# Altium PCB LSR41.PcbDoc (part 1 of 2)
Units mm, origin at the board's own origin, x right, y up, seen from the top; angles counter-clockwise.
Board outline 207.01 x 107.19 mm, 2 copper layers (Top Layer, Bottom Layer), stack 1.671 mm thick; 209 components, 141 nets, 682 pads, 307 vias.
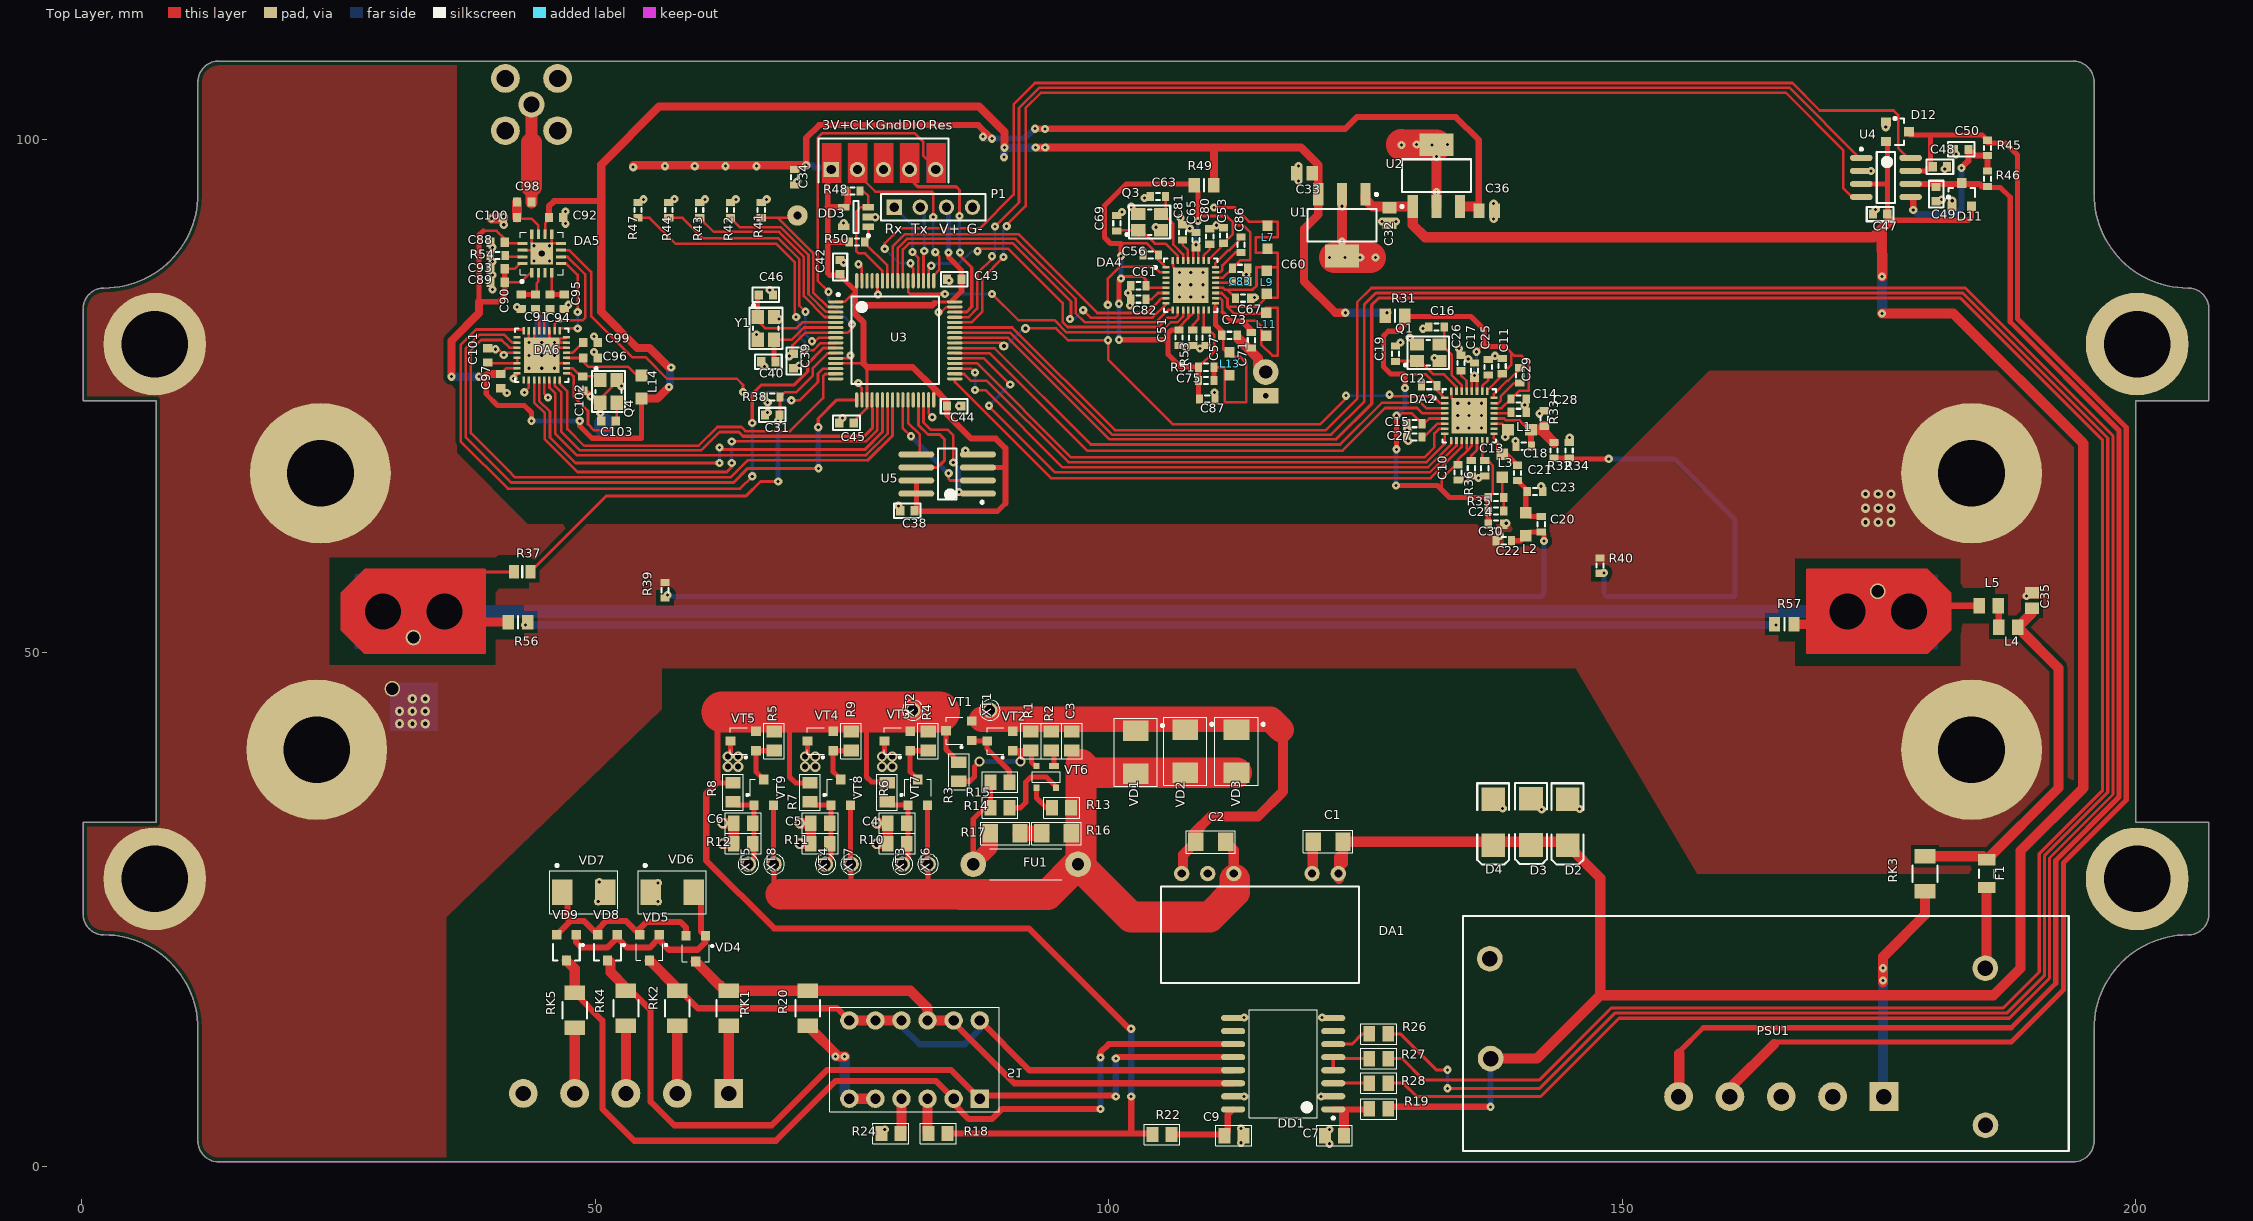
[diagram p0: Top Layer view]
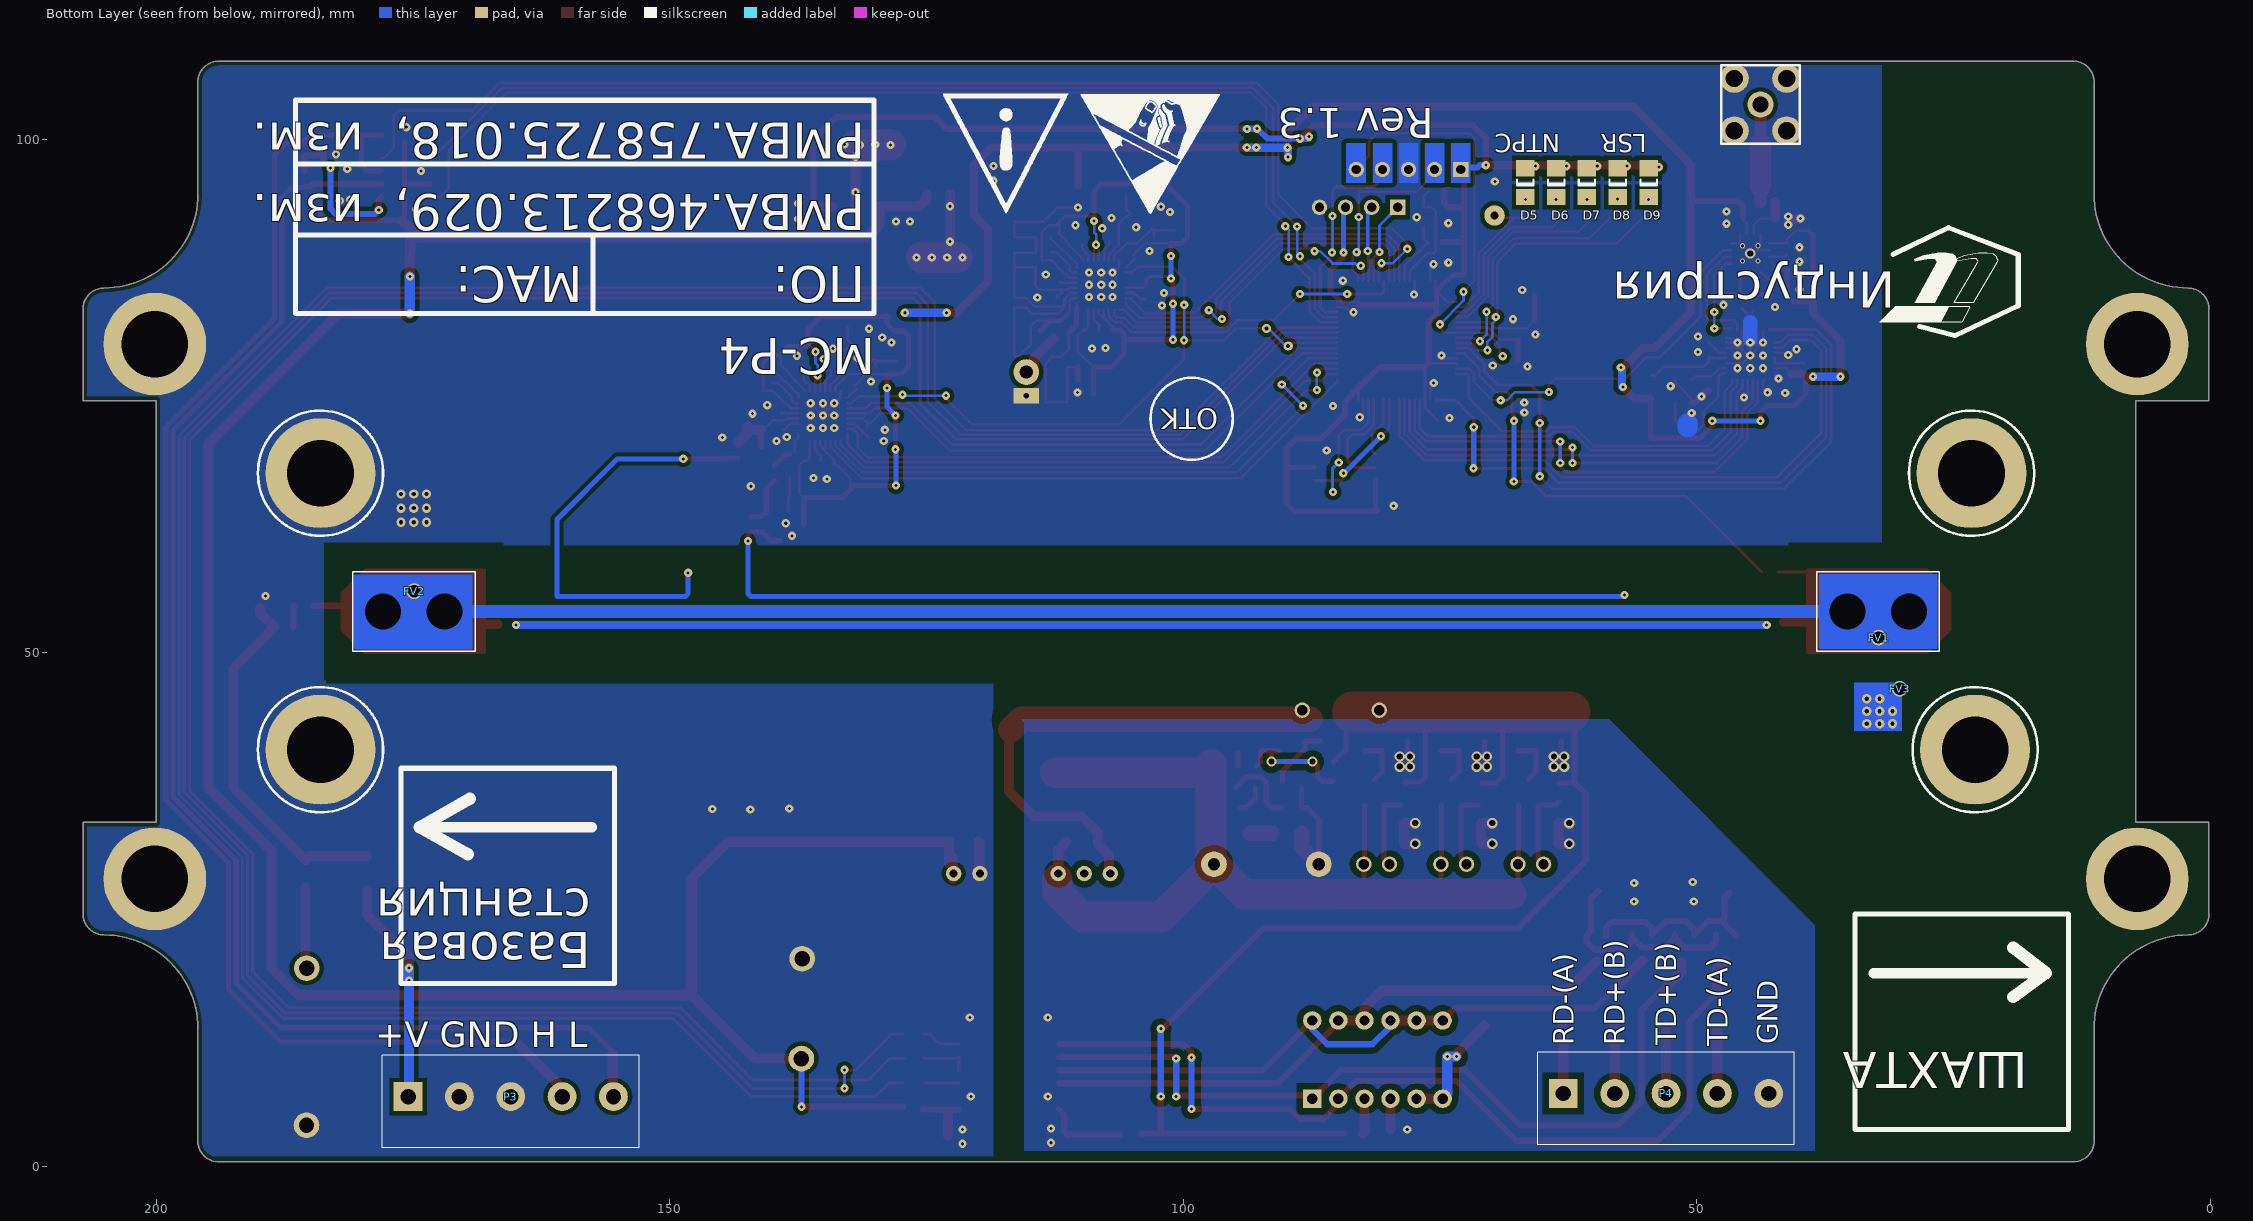
[diagram p1: Bottom Layer view, seen from below]

## Layer stack, top to bottom
Top Solder: solder mask 0.0102, Solder Resist, Dk 3.5
Top Layer: signal copper 0.0356
Dielectric1: core 1.6, FR-4, Dk 4.8
Bottom Layer: signal copper 0.0356
Bottom Solder: solder mask 0.0102, Solder Resist, Dk 3.5

## Board outline
2.168,22.542 cw(c2.169,24.575) 0.136,24.574 0.136,33.515 7.248,33.515 7.248,74.561 0.136,74.561 0.136,83.502 cw(c2.169,83.501) 2.168,85.534 ccw(c2.168,94.678) 11.312,94.678 11.312,105.6 cw(c13.345,105.599) 13.344,107.632 193.938,107.632 cw(c193.938,105.6) 195.97,105.6 195.97,94.678 ccw(c205.114,94.678) 205.114,85.534 cw(c205.114,83.502) 207.146,83.502 207.146,74.561 200.034,74.561 200.034,33.515 207.146,33.515 207.146,24.574 cw(c205.113,24.575) 205.114,22.542 ccw(c205.114,13.398) 195.97,13.398 195.97,2.476 cw(c193.937,2.477) 193.938,0.444 13.344,0.444 cw(c13.345,2.477) 11.312,2.476 11.312,13.398 ccw(c2.168,13.398)

## Design rules (kind name [scope] priority, off if disabled: settings)
Clearance Clearance_Y3_1 [(InNet('GND') AND IsRegion) vs InNet('NetFV1_1')] p1: gap=1
Clearance Clearance_4 [(InNet('+3V3D') AND IsRegion)] p2: gap=0.6
Clearance Clearance_GND_GNDI [InNet('GND') vs InNet('GND_IS1')] p3: gap=3
Clearance Clearance_2 [(InNet('GND_IS1') AND IsRegion)] p4: gap=0.6
Clearance Clearance_1 [(InNet('GND') AND IsRegion)] p5: gap=0.4
Clearance [All] p6: gap=0.2
FabricationTestPointUsage TestPointUsage [All] p1: valid=0 allowmultiple=FALSE
FabricationTestpoint Testpoint [(IsPad And (OnTopLayer Or OnBottomLayer))] p1: side=3 testpointundercomponent=TRUE minsize=1.016 maxsize=2.54 preferedsize=1.524 minholesize=0 maxholesize=1.016 preferedholesize=0.813 testpointgrid=0.025 allowsidetop=TRUE allowsidebottom=TRUE usegrid=TRUE gridtolerance=0
HoleSize [All] p1: absolutevalues=TRUE maxlimit=25.4 minlimit=0.025 maxpercent=80.000 minpercent=20.000
HoleToHoleClearance [All] p1 off: gap=0.254 allowstackedmicrovias=TRUE
MinimumSolderMaskSliver [All] p1 off: minsoldermaskwidth=0.254
PolygonConnect PolygonConnect_2 [IsVia] p1: connectstyle=Direct reliefconductorwidth=0.254 reliefentries=4 polygonreliefangle="90 Angle" airgapwidth=0.254
PolygonConnect PolygonConnect_1 [InNet('GND')and IsVia] p2: connectstyle=Direct reliefconductorwidth=0.254 reliefentries=4 polygonreliefangle="90 Angle" airgapwidth=0.254
PolygonConnect [All] p3: connectstyle=Direct reliefconductorwidth=1 reliefentries=4 polygonreliefangle="90 Angle" airgapwidth=0.254
RoutingVias [All] p1: holewidth=0.4 width=0.9 viastyle="Through Hole" minholewidth=0.4 minwidth=0.9 maxholewidth=0.9 maxwidth=2.5
SilkToSilkClearance [All] p1 off: silktosilkclearance=0.254
SilkToSolderMaskClearance SilkscreenOverComponentPads [IsPad] p1 off: minsilkscreentomaskgap=0.254 clearancetoexposedcopper=TRUE
SolderMaskExpansion [All] p1: expansion=0.102
UnpouredPolygon [All] p1: allowunpoured=FALSE
Width [All] p1: maxlimit=10 minlimit=0.25 preferedwidth=0.3
22 further rules are at their usual default settings.

## Components (designator, comment, footprint, x,y, rotation, side; value= is the part's Value field where it differs from the comment)
C1 "10 мк" "CAP 3216-1206" 121.375,31.625 r0 top
C2 "10 мк" "CAP 3216-1206" 109.952,31.596 r180 top
C3 "1 мкФ, 0805, 10%, X7R, 50В" "CAP 2012-0805N" 96.425,41.425 r90 top
C4 "1000Ф, 0805, 10%, X7R, 50В" "CAP 2012-0805N" 79.425,33.425 r0 top
C5 "1000Ф, 0805, 10%, X7R, 50В" "CAP 2012-0805N" 71.925,33.425 r0 top
C6 "1000Ф, 0805, 10%, X7R, 50В" "CAP 2012-0805N" 64.425,33.425 r0 top
C7 "0,1 мк" "CAP 2012-0805N" 122,3 r0 top
C9 "0,1 мк" "CAP 2012-0805N" 112.2,3 r180 top
C10 "47n" RESC1608L 134.026,67.579 r90 top
C11 "47n" RESC1608L 138.326,77.929 r270 top
C12 "47n" RESC1608L 131.226,76.029 r0 top
C13 "47n" RESC1608L 136.626,67.979 r90 top
C14 "47n" RESC1608L 139.926,74.729 r0 top
C15 "47n" RESC1608L 129.776,72.329 r0 top
C16 "15p" RESC1608L 131.926,81.729 r180 top
C17 "47n" RESC1608L 135.626,77.479 r270 top
C18 "30p" RESC1608L 140.426,70.129 r0 top
C19 "15p" RESC1608L 127.926,79.129 r270 top
C20 "NU" RESC1608L 142.126,62.529 r270 top
C21 "100p" RESC1608L 139.826,67.529 r90 top
C22 "12p" RESC1608L 138.476,60.929 r0 top
C23 "12p" RESC1608L 141.526,65.729 r180 top
C24 "1n" RESC1608L 137.726,63.829 r180 top
C25 "47n" RESC1608L 136.976,77.829 r270 top
C26 "47n" RESC1608L 134.326,78.229 r270 top
C27 "220n" RESC1608L 129.776,71.029 r0 top
C28 "10n" RESC1608L 139.926,73.429 r180 top
C29 "1.5n" RESC1608L 140.026,77.029 r90 top
C30 "47n" RESC1608L 137.726,62.529 r180 top
C31 "100n" CAPC1608L 67.25,73.175 r180 top
C32 "2u2 X7R" CAPC2012L 127.35,92.6 r270 top
C33 "2u2 X7R" CAPC2012L 119.075,96.7 r180 top
C34 "0,1 мкФ, 0603, 10%, X7R, 50В" RESC1608L 69.425,96.325 r90 top
C35 "0.1uF 50V" CAPC2012L 189.925,55.1 r90 top
C36 "2u2 X7R" CAPC2012L 136.825,93.05 r0 top
C38 "100n" CAPC1608L 80.4,63.85 r0 top
C39 "100n" CAPC1608L 69.325,78.425 r270 top
C40 "18p" CAPC1608L 66.873,78.364 r180 top
C42 "100n" CAPC1608L 73.85,87.575 r90 top
C43 "100n" CAPC1608L 84.975,86.4 r180 top
C44 "100n" CAPC1608L 84.952,74.036 r0 top
C45 "100n" CAPC1608L 74.475,72.4 r180 top
C46 "18p" CAPC1608L 66.623,84.864 r0 top
C47 "100n" CAPC1608L 175.127,92.735 r180 top
C48 "15p" CAPC1608L 180.952,97.335 r180 top
C49 "15p" CAPC1608L 180.581,94.683 r90 top
C50 "NU" CAPC1608L 183.027,99.035 r0 top
C51 "47n" RESC1608L 106.85,80.7 r90 top
C53 "47n" RESC1608L 111.2,90.65 r270 top
C56 "47n" RESC1608L 104.1,88.75 r0 top
C57 "47n" RESC1608L 109.5,80.7 r90 top
C60 "47n" RESC1608L 112.8,87.45 r0 top
C61 "47n" RESC1608L 102.9,85.75 r0 top
C63 "15p" RESC1608L 104.8,94.45 r180 top
C65 "47n" RESC1608L 108.5,90.2 r270 top
C67 "7.5p" RESC1608L 113.1,84.55 r180 top
C69 "15p" RESC1608L 100.8,91.85 r270 top
C71 "1.8p" RESC1608L 113.9,80.45 r270 top
C73 "100p" RESC1608L 111.775,80.925 r180 top
C75 "100p" RESC1608L 109.5,76.525 r180 top
C80 "47n" RESC1608L 109.85,90.55 r270 top
C81 "47n" RESC1608L 107.2,90.95 r270 top
C82 "220n" RESC1608L 102.9,84.45 r0 top
C83 "10n" RESC1608L 112.8,86.175 r180 top
C86 "1.5n" RESC1608L 112.9,89.75 r90 top
C87 "47n" RESC1608L 109.6,74.725 r180 top
C88 "NU" capc1608l 40.5,90 r0 top
C89 "1n" capc1608l 40.5,86.1 r180 top
C90 "1p NU" capc1608l 42.8,84.2 r270 top
C91 "82p" capc1608l 44.2,84.2 r90 top
C92 "22p" capc1608l 46.2,92.4 r0 top
C93 "1n" capc1608l 40.5,87.4 r0 top
C94 "82p" capc1608l 45.6,84.2 r90 top
C95 "1p NU" capc1608l 47,84.2 r90 top
C96 "1uF" capc1608l 49.55,78.725 r180 top
C97 "1uF" capc1608l 40.8,76.475 r90 top
C98 "33p" capc1608l 43.1,93.9 r0 top
C99 "100nF" capc1608l 49.55,80.225 r180 top
C100 "1p" capc1608l 41.7,92.4 r0 top
C101 "1uF" capc1608l 39.55,78.975 r270 top
C102 "15p" capc1608l 48.8,76.225 r90 top
C103 "15p" capc1608l 51.3,72.575 r180 top
D2 "1SMB5919" SMB 144.699,33.509 r270 top
D3 "1SMB5919" SMB 141.13,33.542 r270 top
D4 "1SMB5919" SMB 137.449,33.509 r270 top
D5 "LED Yellow" CD3216-1206 66.7,95.8 r270 bottom
D6 "LED Yellow" CD3216-1206 63.7,95.8 r270 bottom
D7 "LED Red" CD3216-1206 60.7,95.8 r270 bottom
D8 "LED Yellow" CD3216-1206 57.7,95.8 r270 bottom
D9 "LED Yellow" CD3216-1206 54.7,95.8 r270 bottom
D11 "BAV99" SOT-23#1 183.081,94.683 r0 top
D12 "BAV99" SOT-23#1 176.875,100.75 r270 top
DA1 "P6LU-0505ELF" P6LU 117.275,32.325 r180 top
DA2 "CC1200" QFN50P500X500-32WAN 135.126,73.079 r0 top
DA4 "CC1200" QFN50P500X500-32WAN 108,85.8 r0 top
DA5 "CC2591" PQFN65P400X400X100_HS-17N 44.8,88.9 r90 top
DA6 "AT86RF233" QFN50P500X500-32WAN 44.8,78.975 r270 top
DD1 "ADM2484E" SOIC127P1030X265-16N 117,10 r180 top
DD3 "24LC64T-I/OT" SOT23-5AN 75.4,92.45 r180 top
F1 "0.2A 1206" RESC3216L 185.5,28.5 r270 top
FU1 "ВП4 0,2А" Fuse10.2-7x2.7 91.925,29.425 r180 top
FV1 "VIA1" VIA3 32.3,51.5 r0 bottom
FV2 "VIA3" VIA3 174.9,56 r0 bottom
FV3 "VIA1" VIA3 30.25,46.509 r0 bottom
L1 "33nH" INDC2012L#1 140.026,71.729 r0 top
L2 "82nH" INDC2012L#1 140.626,62.529 r270 top
L3 "1uH" INDC2012L#1 138.326,68.229 r90 top
L4 "BLM" CAPC2012N 187.6,52.5 r0 top
L5 "BLM" CAPC2012N 185.7,54.6 r0 top
L7 "NU" INDC2012L#2 115.475,90.475 r270 top
L9 "NU" INDC2012L#2 115.4,86.1 r270 top
L11 "NU" INDC2012L#2 115.35,82 r270 top
L13 "NU" INDC2012L#2 111.775,78.15 r270 top
L14 "1 мкГн" INDC2012L#1 54.5,75.9 r90 top
P1 "UART" HDR1X4 79.125,93.4 r0 top
P3 "" "Разъем KLS2-300 5" 165.5,6.8 r180 bottom
P4 "" "Разъем KLS2-300 5" 53,7.1 r180 bottom
PSU1 "Main PSU" PSU_Mod 164,1.5 r0 top
Q1 "Кварц 40000 Гц" NX3225S 131.126,79.229 r90 top
Q3 "40 MHz" NX3225S 104,91.95 r90 top
Q4 "16 MHz" NX3225S 51.3,75.475 r0 top
R1 "510Ом, 1%, 0805, 0,125 Вт" "RES 2012-0805N" 92.425,41.425 r90 top
R2 "100 кОм, 1%, 0805, 0,125 Вт" "RES 2012-0805N" 94.425,41.425 r90 top
R3 "NUОм, 1%, 0805, 0,125 Вт" "RES 2012-0805N" 85.425,38.425 r270 top
R4 "10 кОм, 1%, 0805, 0,125 Вт" "RES 2012-0805N" 82.425,41.425 r90 top
R5 "10 кОм, 1%, 0805, 0,125 Вт" "RES 2012-0805N" 67.425,41.425 r90 top
R6 "680 кОм, 1%, 0805, 0,125 Вт" "RES 2012-0805N" 78.425,36.425 r90 top
R7 "680 кОм, 1%, 0805, 0,125 Вт" "RES 2012-0805N" 70.925,36.425 r90 top
R8 "680 кОм, 1%, 0805, 0,125 Вт" "RES 2012-0805N" 63.425,36.425 r90 top
R9 "10 кОм, 1%, 0805, 0,125 Вт" "RES 2012-0805N" 74.925,41.425 r90 top
R10 "43 кОм, 1%, 0805, 0,125 Вт" "RES 2012-0805N" 79.425,31.425 r0 top
R11 "43 кОм, 1%, 0805, 0,125 Вт" "RES 2012-0805N" 71.925,31.425 r0 top
R12 "43 кОм, 1%, 0805, 0,125 Вт" "RES 2012-0805N" 64.425,31.425 r0 top
R13 "100Ом, 1%, 0805, 0,125 Вт" "RES 2012-0805N" 95.425,34.925 r180 top
R14 "100Ом, 1%, 0805, 0,125 Вт" "RES 2012-0805N" 89.425,34.925 r0 top
R15 "12 кОм, 1%, 0805, 0,125 Вт" "RES 2012-0805N" 89.425,37.425 r0 top
R16 "NU (1)Ом, 1%, 0805, 0,125 Вт" "RES 3216-1206" 94.925,32.425 r0 top
R17 "NU (1)Ом, 1%, 0805, 0,125 Вт" "RES 3216-1206" 89.925,32.425 r0 top
R18 "2 к" "RES 2012-0805N" 83.4,3.2 r180 top
R19 "220" "RES 2012-0805N" 126.3,5.6 r0 top
R20 "120" MF-NSMF050 70.7,15.4 r90 top
R22 "22" "RES 2012-0805N" 105.2,3.1 r180 top
R24 "2 к" "RES 2012-0805N" 78.8,3.2 r0 top
R26 "5,1 к" "RES 2012-0805N" 126.3,12.9 r180 top
R27 "5,1 к" "RES 2012-0805N" 126.3,10.5 r180 top
R28 "5,1 к" "RES 2012-0805N" 126.3,8.1 r180 top
R31 "2" RESC2012N 127.9,82.85 r180 top
R32 "68" RESC1608L 143.376,69.729 r90 top
R33 "68" RESC1608L 142.426,72.829 r270 top
R34 "NU" RESC1608L 144.851,69.729 r270 top
R35 "20" RESC1608L 137.726,65.129 r0 top
R36 "56k" RESC1608L 135.326,67.979 r90 top
R37 "150k" RESC2012L 42.9,57.9 r180 top
R38 "10k" RESC1608L 67.25,74.925 r180 top
R39 "100" RESC1608L 56.8,56.1 r90 top
R40 "100" RESC1608L 147.85,58.5 r90 top
R41 "1k" RESC1608L 66.178,93.121 r270 top
R42 "1k" RESC1608L 63.178,93.121 r270 top
R43 "1k" RESC1608L 60.178,93.121 r270 top
R44 "1k" RESC1608L 57.178,93.121 r270 top
R45 "NU" RESC1608L 185.581,99.183 r270 top
R46 "NU" RESC1608L 185.581,96.183 r90 top
R47 "1k" RESC1608L 54.178,93.121 r270 top
R48 "4,7 кОм, 1%, 0603, 0,06 Вт" RESC1608L 75.05,94.975 r180 top
R49 "2" RESC2012N 109.3,95.55 r0 top
R50 "4,7 кОм, 1%, 0603, 0,06 Вт" RESC1608L 75.5,90.025 r180 top
R51 "10" RESC1608L 109.5,77.825 r0 top
R53 "56k" RESC1608L 108.2,80.7 r90 top
R54 "4.3k" RESC1608L 40.5,88.7 r0 top
R56 "0 NU" RESC2012N 42.5,53 r0 top
R57 "0 NU" RESC2012N 165.8,52.8 r180 top
RK1 "MF-NSMF020" MF-NSMF050 63,15.4 r270 top
RK2 "MF-NSMF020" MF-NSMF050 58,15.4 r270 top
RK3 "MF-NSMF020" MF-NSMF050 179.5,28.5 r270 top
RK4 "MF-NSMF020" MF-NSMF050 53,15.4 r270 top
RK5 "MF-NSMF020" MF-NSMF050 48,15.2 r270 top
S1 "DS1040-06RN" "DIP Switch 6" 81.1,10.4 r180 top
U1 "MCP1703-3302E/DB" SOT-223-DB3_N 122.725,91.65 r270 top
U2 "MCP1703-3302E/DB" SOT-223-DB3_N 131.925,96.475 r90 top
U3 "STM32L476RCT6" LQFP64_STM 79.223,80.439 r0 top
U4 "TJA1040T" SOIC-150-8 175.7,96.3 r0 top
U5 "W25Q32FVSSI" SOIC-150/208-8 84.275,67.425 r180 top
VD1 "1SMB5919" "DO-214AA (1SMB5945)" 102.65,40.325 r270 top
VD2 "1SMB5919" "DO-214AA (1SMB5945)" 107.45,40.425 r270 top
VD3 "1SMB5919" "DO-214AA (1SMB5945)" 112.45,40.425 r270 top
VD4 "BAV99" SOT-23#2 59.8,21.2 r180 top
VD5 "BAV99" SOT-23#2 55.3,21.3 r180 top
VD6 "1SMB5920" "DO-214AA (1SMB5945)" 57.5,26.7 r0 top
VD7 "1SMB5927" "DO-214AA (1SMB5945)" 48.9,26.7 r0 top
VD8 "BAV99" SOT-23#2 51.2,21.3 r180 top
VD9 "BAV99" SOT-23#2 47.2,21.3 r180 top
VT1 "IRLML6402" SOT-23#2 85.425,42.425 r90 top
VT2 "BC857" SOT-23#2 89.425,41.425 r90 top
VT3 "IRLML6402" SOT-23#2 79.425,41.425 r90 top
VT4 "IRLML6402" SOT-23#2 71.925,41.425 r90 top
VT5 "IRLML6402" SOT-23#2 64.425,41.425 r90 top
VT6 "BCM61B" SOT-143B 93.925,37.925 r180 top
VT7 "BC847" SOT-23#2 81.425,36.425 r0 top
VT8 "BC847" SOT-23#2 73.925,36.425 r0 top
VT9 "BC847" SOT-23#2 66.425,36.425 r0 top
XT1 "PLD 1x1" "Тест 1,0/1,5 мм" 88.425,44.425 r270 top
XT2 "PLD 1x1" "Тест 1,0/1,5 мм" 80.925,44.425 r0 top
XT3 "PLD 1x1" "Тест 1,0/1,5 мм" 79.925,29.425 r0 top
XT4 "PLD 1x1" "Тест 1,0/1,5 мм" 72.425,29.425 r0 top
XT5 "PLD 1x1" "Тест 1,0/1,5 мм" 64.925,29.425 r0 top
XT6 "PLD 1x1" "Тест 1,0/1,5 мм" 82.425,29.425 r0 top
XT7 "PLD 1x1" "Тест 1,0/1,5 мм" 74.925,29.425 r0 top
XT8 "PLD 1x1" "Тест 1,0/1,5 мм" 67.425,29.425 r0 top
Y1 "16 MHz" NX3225S-4 66.623,81.614 r0 top

## Footprints (in the part's own frame and the unit in brackets; to place one, negate y for a bottom-side part, rotate by r counter-clockwise, add the part's x,y. Pads: shape width x height; smd on the part's side, far side on the other; paste and mask are expansions set on the pad)
"CAP 2012-0805N" [mm] "Chip Capacitor, Body 2.0x1.3mm, IPC Medium Density"
  rect 1.15x1.5 smd: 1(-0.925,0) 2(0.925,0)
  silkscreen extent -1.75,-1 1.75,1, body extent -1,-0.6 1,0.6, height 0.9
"CAP 3216-1206" [mm] "Chip Cap; Body 3.2 x 1.6 mm (LxW typ)"
  rect 1.5x1.8 smd: 1(-1.45,0) 2(1.45,0)
  silkscreen extent -2.4,-1.1 2.4,1.1, body extent -1.6,-0.8 1.6,0.8, height 1.3
CAPC1608L [mm] "Chip Capacitor, Body 1.6x0.8mm, IPC High Density"
  rect 0.8x0.9 smd: 1(-0.7,0) 2(0.7,0)
  silkscreen extent -1.3,-0.7 1.3,0.7, body extent -0.87,-0.48 0.87,0.48, height 0.85
capc1608l [mm] "Chip Capacitor, Body 1.6x0.8mm, IPC High Density"
  rect 0.8x0.9 smd: 1(-0.7,0) 2(0.7,0)
  body extent -0.87,-0.48 0.87,0.48, height 0.85
CAPC2012L [mm] "Chip Capacitor, Body 2.0x1.3mm, IPC High Density"
  rect 1.1x1.4 smd: 1(-0.75,0) 2(0.75,0)
  body extent -1.1,-0.72 1.1,0.72, height 1.1
CAPC2012N [mm] "Chip Capacitor, Body 2.0x1.3mm, IPC Medium Density"
  rect 1.15x1.5 smd: 1(-0.925,0) 2(0.925,0)
  body extent -1.1,-0.72 1.1,0.72, height 1.1
CD3216-1206 [mm] "Chip Diode; Body 3.2 x 1.6 mm (LxW typ)"
  rect 1.6x1.8 smd: 1(-1.4,0) 2(1.4,0)
  silkscreen extent -0.3,-0.8 0.3,0.8, body extent -1.85,-0.9 1.9,0.9, height 0.5
"DIP Switch 6" [mm]
  rect 1.8x1.8 hole 1: 1(-6.35,3.81)
  round 1.8 hole 1: 2(-3.81,3.81) 3(-1.27,3.81) 4(1.27,3.81) 5(3.81,3.81) 6(6.35,3.81) 7(6.35,-3.81) 8(3.81,-3.81) 9(1.27,-3.81) 10(-1.27,-3.81) 11(-3.81,-3.81) 12(-6.35,-3.81)
  silkscreen extent -8.25,-5.08 8.25,5.08, body extent -8.12,-4.95 8.12,4.95, height 3.7
"DO-214AA (1SMB5945)" [mm] "Стабилитрон 1SMB5945"
  rect 2x2.5 smd: 1(-2.1,0) 2(2.1,0)
  silkscreen extent -3.3,-2.1 3.3,2.73, body extent -2.8,-1.9 2.8,1.9, height 2.4
Fuse10.2-7x2.7 [mm] "Diode, Axial; Body 7 x 2.7 mm (LxDia. max), Lead Dia. 0.53 mm (max)"
  round 2.5 hole 1.2: 1(-5.1,0) 2(5.1,0)
  silkscreen extent -3.5,-1.5 3.5,1.5, body extent -5.4,-1.5 5.4,1.5, height 3.5
HDR1X4 [mm] "Connector; Header; 4 Position"
  rect 1.5x1.5 hole 0.9: 1(0,0)
  round 1.5 hole 0.9: 2(2.54,0) 3(5.08,0) 4(7.62,0)
  silkscreen extent -1.27,-1.27 8.89,1.27
INDC2012L#1 [mm] "Chip Inductor, Body 2.0x1.2mm, IPC High Density"
  rect 1.15x1.15 smd: 1(-1.12,0) 2(1.12,0)
  body extent -1.1,-0.7 1.1,0.7, height 1.1
INDC2012L#2 [mm] "Chip Inductor, Body 2.0x1.2mm, IPC High Density"
  rect 1x1 smd: 1(-1.12,0) 2(1.12,0)
  body extent -1.1,-0.7 1.1,0.7, height 1.1
LQFP64_STM [mm] "Thin QFP, 64-Leads, Body 10x10mm, Pitch 0.5mm, IPC Medium Density"
  oval 1.5x0.3 smd: 1(-5.8,3.75) 2(-5.8,3.25) 3(-5.8,2.75) 4(-5.8,2.25) 5(-5.8,1.75) 6(-5.8,1.25) 7(-5.8,0.75) 8(-5.8,0.25) 9(-5.8,-0.25) 10(-5.8,-0.75) 11(-5.8,-1.25) 12(-5.8,-1.75) 13(-5.8,-2.25) 14(-5.8,-2.75) 15(-5.8,-3.25) 16(-5.8,-3.75) 33(5.8,-3.75) 34(5.8,-3.25) 35(5.8,-2.75) 36(5.8,-2.25) 37(5.8,-1.75) 38(5.8,-1.25) 39(5.8,-0.75) 40(5.8,-0.25) 41(5.8,0.25) 42(5.8,0.75) 43(5.8,1.25) 44(5.8,1.75) 45(5.8,2.25) 46(5.8,2.75) 47(5.8,3.25) 48(5.8,3.75)
  oval 0.3x1.5 smd: 17(-3.75,-5.8) 18(-3.25,-5.8) 19(-2.75,-5.8) 20(-2.25,-5.8) 21(-1.75,-5.8) 22(-1.25,-5.8) 23(-0.75,-5.8) 24(-0.25,-5.8) 25(0.25,-5.8) 26(0.75,-5.8) 27(1.25,-5.8) 28(1.75,-5.8) 29(2.25,-5.8) 30(2.75,-5.8) 31(3.25,-5.8) 32(3.75,-5.8) 49(3.75,5.8) 50(3.25,5.8) 51(2.75,5.8) 52(2.25,5.8) 53(1.75,5.8) 54(1.25,5.8) 55(0.75,5.8) 56(0.25,5.8) 57(-0.25,5.8) 58(-0.75,5.8) 59(-1.25,5.8) 60(-1.75,5.8) 61(-2.25,5.8) 62(-2.75,5.8) 63(-3.25,5.8) 64(-3.75,5.8)
  silkscreen extent -5.67,-4.25 4.25,4.57, body extent -5,-5 5,5, height 1.6
MF-NSMF050 [mm] "Предохранитель самовосст."
  rect 1.4x2 smd: 1(-1.7,0) 2(1.7,0)
  silkscreen extent -0.8,-1.2 0.8,1.2, body extent -1.7,-0.9 1.7,0.9, height 0.85
NX3225S [mm] "Quartz Crystal, SMD, 3.2mm x 2.5mm"
  rect 1.2x1.4 smd: 1(-0.8,1.1) 2(-0.8,-1.1) 3(0.8,-1.1) 4(0.8,1.1)
  silkscreen extent -1.6,-2 1.6,2.34
NX3225S-4 [mm] "Quartz Crystal, SMD, 3.2mm x 2.5mm"
  rect 1.2x1.4 smd: 1(-0.8,1.1) 2(0.8,1.1) 3(0.8,-1.1) 4(-0.8,-1.1)
  silkscreen extent -1.6,-2 1.6,2.34
P6LU [mm] "DC/DC"
  round 1.5 hole 0.8: 1(-5.1,3.81) 2(-2.54,3.81) 5(5.08,3.81) 6(7.62,3.81) 7(10.16,3.81)
  silkscreen extent -7.11,5.08 12.19,14.48, body extent -7.17,3.68 12.33,13.8, height 6
PQFN65P400X400X100_HS-17N [mm] "PQFN, 16-Leads, Body 4,00x4,00mm, Pitch 0,65mm, Thermal Pad 2,16x2,16mm, IPC Medium Density"
  rect 0.95x0.3 smd: 1(-1.875,0.975) 2(-1.875,0.325) 3(-1.875,-0.325) 4(-1.875,-0.975) 9(1.875,-0.975) 10(1.875,-0.325) 11(1.875,0.325) 12(1.875,0.975)
  rect 0.3x0.95 smd: 5(-0.975,-1.875) 6(-0.325,-1.875) 7(0.325,-1.875) 8(0.975,-1.875) 13(0.975,1.875) 14(0.325,1.875) 15(-0.325,1.875) 16(-0.975,1.875)
  rect 2.16x2.16 smd: 17(0,0)
  silkscreen extent -2.85,-2.07 2.07,2.07, body extent -2.07,-2.07 2.07,2.07, height 1
PSU_Mod [mm] "PSU_Module"
  round 2.5 hole 1.5: 1(21.375,17.8) 2(21.39,2.5) 3(-26.8,9) 4(-26.875,18.725)
  silkscreen extent -29.5,0 29.5,22.87
QFN50P500X500-32WAN [mm] "QFN, 32-Leads, Body 5x5mm, Pitch 0.5mm, IPC Medium Density"
  rect 0.7x0.25 smd: 1(-2.4,1.75) 2(-2.4,1.25) 3(-2.4,0.75) 4(-2.4,0.25) 5(-2.4,-0.25) 6(-2.4,-0.75) 7(-2.4,-1.25) 8(-2.4,-1.75) 17(2.4,-1.75) 18(2.4,-1.25) 19(2.4,-0.75) 20(2.4,-0.25) 21(2.4,0.25) 22(2.4,0.75) 23(2.4,1.25) 24(2.4,1.75)
  rect 0.25x0.7 smd: 9(-1.75,-2.4) 10(-1.25,-2.4) 11(-0.75,-2.4) 12(-0.25,-2.4) 13(0.25,-2.4) 14(0.75,-2.4) 15(1.25,-2.4) 16(1.75,-2.4) 25(1.75,2.4) 26(1.25,2.4) 27(0.75,2.4) 28(0.25,2.4) 29(-0.25,2.4) 30(-0.75,2.4) 31(-1.25,2.4) 32(-1.75,2.4)
  rect 3.45x3.45 smd: 33(0,0)
  silkscreen extent -3.57,-2.6 2.6,2.6, body extent -2.58,-2.58 2.58,2.58, height 0.8
"RES 2012-0805N" [mm] "Chip Resistor, Body 2.0x1.3mm, IPC Medium Density"
  rect 1.15x1.5 smd: 1(-0.925,0) 2(0.925,0)
  silkscreen extent -1.75,-1 1.75,1, body extent -1,-0.6 1,0.6, height 0.5
"RES 3216-1206" [mm] "Chip Resistor; Body 3.2 x 1.6 mm (LxW typ)"
  rect 1.5x1.8 smd: 1(-1.45,0) 2(1.45,0)
  silkscreen extent -2.4,-1.1 2.4,1.1, body extent -1.6,-0.8 1.6,0.8, height 0.6
RESC1608L [mm] "Chip Resistor, Body 1.6x0.8mm, IPC High Density"
  rect 0.7x0.9 smd: 1(-0.75,0) 2(0.75,0)
  silkscreen extent -0.2,-0.35 0.2,0.35, body extent -0.85,-0.48 0.85,0.48, height 0.6
RESC2012L [mm] "Chip Resistor, Body 2.0x1.3mm, IPC High Density"
  rect 1x1.3 smd: 1(-0.8,0) 2(0.8,0)
  silkscreen extent 0,-0.55 0,0.55, body extent -1.07,-0.7 1.07,0.7, height 0.65
RESC2012N [mm] "Chip Resistor, Body 2.0x1.3mm, IPC Medium Density"
  rect 1.1x1.4 smd: 1(-0.95,0) 2(0.95,0)
  silkscreen extent 0,-0.6 0,0.6, body extent -1.07,-0.7 1.07,0.7, height 0.65
RESC3216L [mm] "Chip Resistor, Body 3.2x1.6mm, IPC High Density"
  rect 1.1x1.7 smd: 1(-1.35,0) 2(1.35,0)
  silkscreen extent -0.4,-0.75 0.4,0.75, body extent -1.68,-0.87 1.68,0.87, height 0.71
SMB [mm] "DO-214-AA/SMB; 2 C-Bend Leads; Body 5.3 x 3.6 mm, inc. leads (LxW)"
  rect 2.3x2.3 smd: 1(-2.25,0) 2(2.25,0)
  silkscreen extent -3.8,-1.55 4.1,1.55
SOIC127P1030X265-16N [mm] "SOIC, 16-Leads, Body 10,5x7,6mm (max), Pitch 1,27mm, IPC Medium Density"
  oval 2.35x0.6 smd: 1(-4.875,4.445) 2(-4.875,3.175) 3(-4.875,1.905) 4(-4.875,0.635) 5(-4.875,-0.635) 6(-4.875,-1.905) 7(-4.875,-3.175) 8(-4.875,-4.445) 9(4.875,-4.445) 10(4.875,-3.175) 11(4.875,-1.905) 12(4.875,-0.635) 13(4.875,0.635) 14(4.875,1.905) 15(4.875,3.175) 16(4.875,4.445)
  silkscreen extent -5,-5.25 3.3,5.42, body extent -5.15,-5.08 5.15,5.08, height 2.65
SOIC-150-8 [mm] "SOIC, 8-Leads, Body 4.9x3.9mm, Pitch 1.27mm, IPC Medium Density"
  oval 2.2x0.6 smd: 1(-2.4,1.905) 2(-2.4,0.635) 3(-2.4,-0.635) 4(-2.4,-1.905) 5(2.4,-1.905) 6(2.4,-0.635) 7(2.4,0.635) 8(2.4,1.905)
  silkscreen extent -2.52,-2.5 0.9,2.88, body extent -2,-2.5 2,2.5, height 1.75
SOIC-150/208-8 [mm] "SOIC, 8-Leads"
  oval 3.5x0.6 smd: 1(-3,1.905) 2(-3,0.635) 3(-3,-0.635) 4(-3,-1.905) 5(3,-1.905) 6(3,-0.635) 7(3,0.635) 8(3,1.905)
  silkscreen extent -3.52,-2.5 0.9,2.88, body extent -2.73,-2.75 2.73,2.75, height 2.03
SOT23-5AN [mm] "SOT23, 5-Leads, Body 2.9x1.6mm, Pitch 0.95mm, Lead Span 2.8mm, IPC Medium Density"
  rect 1.1x0.65 smd: 1(-1.2,0.95) 2(-1.2,0) 3(-1.2,-0.95) 4(1.2,-0.95) 5(1.2,0.95)
  silkscreen extent -1.33,-1.55 0.25,1.95, body extent -0.9,-1.55 0.9,1.55, height 1.45
SOT-23#1 [mm] "SOT-23; 3 Leads; Body 3.1 x 2.5 mm, inc. leads (LxW max)"
  rect 0.9x0.95 smd: 1(-0.95,-1.175) 2(0.95,-1.175) 3(0,1.075)
  silkscreen extent -1.42,-0.42 1.3,0.6
SOT-23#2 [mm] "SOT-23; 3 Leads; Body 3.0 x 2.6 mm, inc. leads (LxW max)"
  rect 0.9x0.95 smd: 1(-0.95,-1.25) 2(0.95,-1.25) 3(0,1.25)
  silkscreen extent -1.68,-0.38 1.3,1.25, body extent -1.5,-1.15 1.5,1.15, height 1.1
SOT-143B [mm]
  rect 1x0.6 smd: 1(-0.75,-1.05)
  rect 0.6x0.6 smd: 2(0.95,-1.05) 3(0.95,1.05) 4(-0.95,1.05)
  silkscreen extent -1.38,-0.5 1.38,0.5, body extent -1.45,-1.18 1.45,1.18, height 1.22
SOT-223-DB3_N [mm] "SOT223, 4-Leads, Body 6.5x3.5mm, Pitch 2.3mm, Lead Span 7mm, IPC Medium Density"
  rect 2.2x1 smd: 1(-3,2.3) 2(-3,0) 3(-3,-2.3)
  rect 2.2x3.3 smd: 4(3,0)
  silkscreen extent -3.12,-3.35 1.6,3.48, body extent -1.85,-3.35 1.85,3.35, height 1.8
VIA3 [mil]
  round 60 hole 47: 1(0,0)
"Разъем KLS2-300 5" [mm] "Разъем KLS2-300 5"
  rect 2.8x2.8 hole 1.5: 1(-10,0)
  round 2.8 hole 1.5: 2(-5,0) 3(0,0) 4(5,0) 5(10,0)
  silkscreen extent -12.5,-5 12.5,4
"Тест 1,0/1,5 мм" [mm]
  round 1.5 hole 1: 1(0,0)
  silkscreen extent -1,-1 1,1

## Part data
C1 C2: library part "Cap 3216-1206", "10 мкФ, корпус 1206, 10%, X7R, 25В"
C3 C4 C5 C6 C34: library part "Cap 2012-0805"
C7 C9: library part "Cap 2012-0805", "1 мкФ, корпус 0805, 10%, X7R, 50В"
C10 C11 C12 C13 C14 C15 C16 C17 C18 C19 C20 C21 C22 C23 C24 C25 C26 C27 C28 C29 C30 C31 C32 C33 C35 C36 C38 C39 C40 C42 C43 C44 C45 C46 C47 C48 C49 C50 C51 C53 C56 C57 C60 C61 C63 C65 C67 C69 C71 C73 C75 C80 C81 C82 C83 C86 C87 C88 C89 C90 C91 C92 C93 C94 C95 C96 C97 C98 C99 C100 C101 C102 C103: library part Cap, "Capacitor"
D2 D3 D4: library part 10BQ040, "Schottky Rectifier"
D5 D6 D7 D8 D9: library part LED1, "Typical RED GaAs LED"
D11 D12: library part BAV99_1, "Silicon Switching Diode Array for High-Speed Switching"
DD3: library part 24LC01BT-I/OT
F1: library part "Fuse 1", "Fuse"
FU1: library part Предохранитель
FV1 FV2 FV3: library part Socket, "Socket"
L1 L2 L3 L7 L9 L11 L13: library part INDUCTOR
L4 L5: library part "Ferrite Bead", "Ferrite Bead"
L14: library part "Дроссель 1...6 мкГн"
P1: library part "Header 4", "Header, 4-Pin"
P3 P4: library part "Разъем PLD 1x5"
PSU1: library part PSU
Q1 Q3 Q4: library part "Кварц 32768 Гц"
R1 R2 R3 R4 R5 R6 R7 R8 R9 R10 R11 R12 R13 R14 R15 R16 R17: library part "Res 2012-0805"
R18 R24: library part "Res 2012-0805", "20 кОм, корпус 0805, 5%, 0,125 Вт"
R19 R22: library part "Res 2012-0805", "220 Ом, корпус 0805, 5%, 0,125 Вт"
R20: library part "Res 3216-1206", "120 Ом, корпус 1206, 5%, 0,25 Вт"
R26 R27 R28: library part "Res 2012-0805", "5,1 кОм, корпус 0805, 5%, 0,125 Вт"
R31 R32 R33 R34 R35 R36 R37 R38 R39 R40 R41 R42 R43 R44 R45 R46 R47 R49 R51 R53 R54 R56 R57: library part Res, "Resistor"
R48 R50: library part "Res 0603"
RK1 RK2 RK3 RK4 RK5: library part MF-NSMF050
S1: library part "DIP Switch 6"
U1 U2: "250 mA, 16V, Low Quiescent Current LDO Regulator, 3-Pin SOT-223, Extended Temperature"
U3: library part STM32F405RCT6, "Cortex-M4F  MCU, 64 pin, 168 MHz, 256/512 KB Flash, 192+4 KB RAM"
U4: library part TJA1040, "High-Speed CAN Tranceiver"
U5: "32 Mb 2.7-3.6 V Serial Flash"
VD1 VD2 VD3: library part 1N5352
VD4 VD5 VD8 VD9: library part BAT54S
VD6 VD7: library part 1SMB5945, "1SMB5945"
VT1 VT3 VT4 VT5: library part IRLML5203, "IRLML5203"
VT2: library part "BC857 (PNP SOT-23)"
VT7 VT8 VT9: library part "BC847 (NPN SOT-23)"
Y1: library part XTAL_SMD, "Crystal Oscillator"

## Free pads (board coordinates)
  round 10 hole 6.5: 0(7.12,28) 0(7.12,80.07) 0(200.16,28) 0(200.16,80.07)
  round 13.7 / inner round 13.7 / far side round 10.7 hole 6.5: 0(22.9,40.575) 0(23.25,67.5) 0(184.03,40.575) 0(184.03,67.5)
  round 2 hole 0.8: 0(69.7,92.6)
  rect 2.5x1.5 hole 0.5: 0(115.3,75.05)
  round 2.5 hole 1.3: 0(115.3,77.35)
  round 0.025 / inner round 1.524 / far side rect 0.025x0.025 hole 3.505: 1(29.346,54.038) 1(177.936,54.038) 2(35.315,54.038) 2(171.967,54.038)
  round 2.54 hole 1.524: 1(43.8,103.4)
  rect 1.5x1.5 hole 0.9: 1(73,97.075)
  round 2.8 hole 1.7: 2(41.26,100.86) 3(46.34,100.86) 4(46.34,105.94) 5(41.26,105.94)
  round 1.5 hole 0.9: 2(75.54,97.075) 3(78.08,97.075) 4(80.62,97.075) 5(83.16,97.075)

## Via types
v1: diameter 0.8, hole 0.3, Top Layer to Bottom Layer, tented both sides, 263 vias
v2: diameter 1, hole 0.6, Top Layer to Bottom Layer, tented both sides, 21 vias
v3: diameter 0.9, hole 0.4, Top Layer to Bottom Layer, tented both sides, 19 vias
v4: diameter 0.5, hole 0.3, Top Layer to Bottom Layer, tented both sides, 4 vias

## Nets (pads, with @x,y where several pads share a name; then routed paths per layer and width w, separated by ;. In a path a pad name is that pad's centre, name@x,y a point inside that pad or via, vN(x,y) a via of type N, cw(c..) or ccw(c..) an arc to the next point about the centre after c; other vN are vias at no path point)
485_DIR: R27.1 U3.41 | length 255.9
  Top Layer w0.25: U3.41@85.023,80.689 90.211,80.689 100.1,70.8 122.15,70.8
  Top Layer w0.3: 122.15,70.8 125.625,74.275 125.625,83.9 126.275,84.55 182.975,84.55 196.8,70.725 196.8,36.625 190.627,30.452 190.627,18.927 187.125,15.425 148.95,15.425 141.925,8.4 130.7,8.4 128.6,10.5 R27.1@127.225,10.5
485_RX: R28.1 U3.43 | length 259.1
  Top Layer w0.25: U3.43@85.023,81.689 90.611,81.689 100.6,71.7 121.15,71.7 124.2,74.75 124.2,84.15 125.6,85.55
  Top Layer w0.3: 125.6,85.55 183.389,85.55 197.8,71.139 197.8,36.211 191.627,30.037 191.627,18.336 187.716,14.425 149.7,14.425 142.075,6.8 130,6.8 128.7,8.1 R28.1@127.3,8.1
485_TX: R26.1 U3.42 | length 260.2
  Top Layer w0.25: U3.42@85.023,81.189 90.411,81.189 100.35,71.25 121.675,71.25 124.9,74.475 124.9,83.925
  Top Layer w0.3: 124.9,83.925 126.025,85.05 183.182,85.05 197.3,70.932 197.3,36.418 191.127,30.244 191.127,18.578 187.474,14.925 149.299,14.925 141.974,7.6 v1(133,7.6) v1@132.8,7.6 ; R26.1@127.3,12.9 128.4,12.9 131.9,9.4 v1(133,9.4)
  Bottom Layer w0.3: v1(133,7.6) v1(133,9.4)
+3LF: C10.2 C11.2 C12.2 C13.2 C14.1 C15.2 C17.2 C24.2 C30.2 DA2.1 DA2.5 DA2.12 DA2.13 DA2.15 DA2.22 DA2.25 DA2.27 DA2.28 R31.1 R35.1 | length 88
  Top Layer w0.25: v1@128.026,72.829 128.526,73.329 129.526,73.329 C15.2@130.526,72.329 ; 128.801,77.079 128.726,77.154 130.851,77.154 C12.2@131.976,76.029 ; C15.2@130.776,72.079 130.776,72.379 131.226,72.829 DA2.5@132.726,72.829 ; C12.2@131.851,75.704 DA2.1@132.726,74.829 ; 132.426,66.029 132.426,66.929 133.826,68.329 C10.2@134.026,68.329 134.026,68.829 134.976,69.779 ; DA2.12@134.876,70.679 134.876,69.879 134.976,69.779 ; DA2.13@135.376,70.679 135.376,70.179 134.976,69.779 ; DA2.28@135.376,75.479 C17.2@135.376,76.479 ; C17.2@135.626,76.729 135.876,76.479 DA2.27@135.876,75.479 ; v1(135.826,79.329) 136.326,79.829 136.551,79.829 ; DA2.15@136.376,70.679 136.376,68.979 C13.2@136.626,68.729 136.926,68.729 137.426,68.229 137.426,65.579 R35.1@136.976,65.129 R35.1@136.826,64.979 ; DA2.25@136.876,75.479 136.876,75.579 138.326,77.029 C11.2@138.326,77.179 139.226,78.079 139.226,79.229 ; DA2.22@137.526,73.829 138.276,73.829 C14.1@139.176,74.729 139.976,75.529 140.926,75.529 140.926,78.229 140.226,78.929 139.526,78.929 138.626,79.829
  Top Layer w0.5: v1(128,66.3) 132.03,66.3 133.201,65.129 R35.1@136.976,65.129 C24.2@136.976,63.829 C30.2@136.976,62.529 ; v1(128.026,69.829) v1@128.026,72.829 ; R31.1@128.668,82.771 135.284,82.771 136.551,81.504 136.551,79.829 138.626,79.829 ; 128.726,77.154 127.476,77.154 126.759,77.871 126.759,80.862 127.222,81.325 128.15,81.325 128.85,82.025 R31.1@128.85,82.85 ; 128.801,77.079 128.875,77.005 v1(128.875,75.8)
  Bottom Layer w0.25: v1(135.626,77.029) 135.626,78.029 135.826,78.229 v1(135.826,79.329)
  Bottom Layer w0.5: v1(128,66.3) 128,69.803 v1(128.026,69.829) ; v1(128.026,73.129) 128.875,73.978 v1(128.875,75.8)
+3V3A: C33.1 C88.2 C89.1 C92.1 C93.2 C97.2 DA5.1 DA5.10 DA5.13 DA5.16 DA6.15 L14.1 R31.2 R49.2 U1.3 | length 198.5
  Top Layer w0.25: 39.1,91.1 40.4,91.1 41.2,90.3 C88.2@41.2,90 ; C89.1@41.2,86.1 42.8,86.1 DA5.1@43.775,87.075 ; C93.2@41.2,87.4 42.15,87.4 DA5.16@42.675,87.925 ; C88.2@41.325,89.875 DA5.13@42.925,89.875 ; DA5.10@45.125,90.775 45.125,91.825 C92.1@45.55,92.25
  Top Layer w0.254: C97.2@40.8,77.175 41.35,77.725 DA6.15@42.4,77.725
  Top Layer w0.5: 39.1,91.1 38.7,90.7 38.7,84.2 40.6,84.2 41.2,84.8 C89.1@41.2,86.1 C93.2@41.2,87.4 ; 39.4,76.9 39.4,75.2 40.5,74.1 43.1,74.1 43.8,73.4 v1@43.8,72.754 ; v1(48.5,72.6) 48.5,72.1 49.7,70.9 54.5,70.9 L14.1@54.5,74.78 ; v1@57.2,77.8 v1(57.4,77.8)
  Top Layer w0.6: C92.1@45.5,92.4 45.5,93.5 46,94 50.6,94
  Top Layer w0.8: v1(36,76.9) 36,80.4 38.7,83.1 38.7,84.2 ; v1(38.7,76.9) 39.4,76.9 39.675,77.175 C97.2@40.8,77.175 ; L14.1@54.5,74.78 56.08,74.78 v1(57.2,75.9) ; v1@57.2,77.8 55.3,79.7 54.1,79.7 50.6,83.2 50.6,94 50.6,97.575 56.225,103.2 87.4,103.2 89.85,100.75 v1(89.85,99.2) ; v1(92.9,99.225) v1(93.825,99.225) 110.15,99.225 ; R49.2@110.25,95.55 110.25,99.125 110.15,99.225 ; v1(123.05,83.125) 122.075,83.125 119.025,86.175 119.025,91.3 120.425,92.7 U1.3@120.425,94.65 120.425,97.525 118.725,99.225 110.15,99.225
  Bottom Layer w0.5: v1(43.8,72.6) v1(48.5,72.6) ; v1@57.3,77.7 v1(57.4,77.8)
  Bottom Layer w0.8: v1(36,76.9) v1(38.7,76.9) ; v1@57.3,75.9 v1@57.3,77.7 ; v1(89.825,98.275) 89.825,99.175 v1(89.85,99.2) 93.8,99.2 v1(93.825,99.225) ; v1(123.05,83.125) v1(127.125,83.125)
+3V3D: C34.2 C36.1 C38.2 C42.1 C43.1 C44.1 C45.1 D5.1 D6.1 D7.1 D8.1 D9.1 DD3.4 P1.3 pad.1@73,97.075 R48.2 R50.2 U2.3 U3.1 U3.13 U3.19 U3.32 U3.48 U3.64 U5.3 U5.7 U5.8 | length 198.5
  Top Layer w0.25: U3.13@73.423,78.189 76.111,78.189 76.131,78.21 ; U3.1@73.423,84.189 74.272,84.189 75.341,85.259 ; C45.1@75.22,72.592 76.473,73.845 76.473,77.827 ; 75.473,85.2 U3.64@75.473,86.239 ; 82.948,75.8 82.948,74.664 U3.32@82.973,74.639
  Top Layer w0.3: 83.025,84.189 U3.48@85.023,84.189
  Top Layer w0.5: pad.1@72.65,97.25 72.65,93.475 72.65,90.025 72.65,86.95 72.825,86.775 C42.1@73.775,86.775 ; C42.1@73.975,86.625 75.341,85.259 75.341,83.85 75.341,82.99 ; C38.2@81.1,63.85 C38.2@81.365,63.85 ; U5.7@81.275,66.79 U5.8@81.275,65.52 81.275,64.125 81.6,63.8 89.175,63.8 89.95,64.575 ; v1(84.4,89) 84.4,88.55 85.675,87.275 C43.1@85.675,86.4 ; U3.48@84.744,84.294 85.675,85.225 ; U5.3@87.275,68.06 89.9,68.06
  Top Layer w0.56: 85.675,85.225 C43.1@85.675,86.4
  Top Layer w0.6: v1(70.55,97.5) 70.55,100.15 71.8,101.4 87.325,101.4 v1(88.65,100.075) ; 72.65,90.025 R50.2@74.75,90.025 ; 72.65,93.475 72.725,93.4 DD3.4@74.2,93.4 74.6,93.8 R48.2@74.6,94.975 ; 75.341,82.99 76.131,82.2 76.131,78.21 ; 75.341,83.85 82.827,83.85 83.052,84.075 ; 76.111,78.189 76.473,77.827 80.921,77.827 82.948,75.8 84.252,74.496 C44.1@84.252,74.036 84.252,73.223 86.6,70.875 89.025,70.875 89.95,69.95 89.95,64.575 ; v1(92.825,101.05) 123.05,101.05 124.175,102.175 133.825,102.175 136.05,99.95 C36.1@136.05,93.075 ; C36.1@135.65,93.475 C36.1@136.05,93.075 ; C36.1@136.075,93.05 C36.1@136.05,93.075
  Top Layer w0.8: v1@53.7,97.5 v1(70.55,97.5)
  Top Layer w1: U2.3@134.225,93.475 C36.1@135.65,93.475
  Bottom Layer w0.5: P1.3@84.205,93.4 84.4,93.205 v1(84.4,89)
  Bottom Layer w0.6: v1(70.55,97.5) 71.15,97.5 71.375,97.275 pad.1@73.05,97.275 ; v1@87.775,100.075 v1(88.65,100.075) 88.675,100.1 91.825,100.1 v1@92.688,100.962 ; v1(92.825,101.05) v1@94,101.05
  other v1: 53.7,97.3 56.8,97.4 59.7,97.4 62.7,97.4 65.7,97.4 87.775,100.275 93.8,101.025
+5V: C1.2 C32.1 C47.1 D2.2 D3.2 D4.2 D11.2 D12.2 DA1.1 PSU1.3 R19.2 U1.1 U2.1 U4.3 | length 273
  Top Layer w0.5: U4.3@173.3,95.665 175.7,95.665 ; D12.2@175.852,99.755 175.852,92.61 176.327,92.135 183.752,92.135 184.031,92.413 D11.2@184.031,93.508
  Top Layer w0.6: R19.2@127.3,5.8 v1(137.2,5.8)
  Top Layer w1: DA1.1@122.435,28 122.435,30.125 ; DA1.1@122.435,29.125 122.825,29.515 C1.2@122.825,31.625 144.333,31.625 D2.2@144.699,31.259 147.875,28.083 147.875,16.675 ; U1.1@125.025,94.65 125.025,94.15 125.7,93.475 U2.1@129.625,93.475 129.625,91.675 130.825,90.475 174.478,90.475 175.3,91.297 ; PSU1.3@137.2,10.5 141.7,10.5 147.875,16.675 ; v1(175.325,83.05) 182.25,83.05 194.9,70.4 194.9,36.836 188.8,30.736 188.8,19.3 186.175,16.675 147.875,16.675 ; v1(175.325,86.65) 175.3,91.297 ; 176.02,92.017 175.3,91.297
  Bottom Layer w0.6: v1@137.2,5.9 PSU1.3@137.2,10.5
  Bottom Layer w1: v1(175.325,83.05) v1(175.325,86.65)
+5V_IS1: R3.1 R4.2 R5.2 R6.2 R7.2 R8.2 R9.2 R18.1 R22.2 VT1.3 VT3.2 VT4.2 VT5.2 XT2.1 | length 133.5
  Top Layer w0.5: 62,37.35 R8.2@63.425,37.35 ; 68.925,42.425 68.925,37.925 69.5,37.35 R7.2@70.925,37.35 ; 76.425,42.925 76.425,37.925 76.925,37.425 78.35,37.425 R6.2@78.425,37.35 ; VT1.3@84.175,42.425 84.175,40.6 R3.1@85.425,39.35
  Top Layer w0.6: 62.35,44.25 61.925,43.825 61.925,37.425 60.825,36.325 60.825,29.775 67.425,23.175 92.225,23.175 v1@102.1,13.3 ; R18.1@84.325,3.2 102.1,3.2 ; v1(102.2,6.8) 102.2,3.3 102.1,3.2 ; R22.2@104.175,3.2 102.1,3.2
  Top Layer w4: 62.35,44.25 83.55,44.25
  Bottom Layer w0.6: v1(102.2,6.8) v1(102.2,13.4)
+VIN: C35.1 F1.1 L4.2 RK3.1 | length 35.8
  Top Layer w1: RK3.1@179.5,30.2 185.15,30.2 F1.1@185.5,29.85 192.5,36.85 192.5,48.525 L4.2@188.525,52.5 189.925,53.9 C35.1@189.925,54.35
AT_DIG2: DA6.10 U3.17 | length 60.6
  Top Layer w0.254: DA6.10@42.4,80.225 41.906,80.225 41.162,80.969 38.695,80.969 37.4,79.674 37.4,71 41.8,66.6 45.574,66.6
  Top Layer w0.3: 45.574,66.6 63.5,66.6 64.875,67.975 v1(71.75,67.975) ; v1(71.725,71.975) 71.725,72.825 73.539,74.639 U3.17@75.473,74.639
  Bottom Layer w0.3: v1@71.725,68 v1(71.75,67.975)
  Bottom Layer w0.5: v1@71.725,68 v1(71.725,71.975)
AT_IRQ: DA6.24 U3.15 | length 36.4
  Top Layer w0.25: 61.9,72 64.237,72 64.637,71.6 68.975,71.6 72.2,74.825 72.2,76.955 72.409,77.164 73.398,77.164 U3.15@73.423,77.189
  Top Layer w0.254: DA6.24@46.55,76.575 46.55,76.222 47.3,75.472 47.3,71.8 48.925,70.175 60.075,70.175 61.9,72
AT_MISO: DA6.20 U3.22 | length 44.8
  Top Layer w0.25: v1(62.1,70) v1@62.3,69.8
  Top Layer w0.254: DA6.20@44.55,76.575 44.55,74.55 45.6,73.5 45.6,71 48.1,68.5 v1(62.1,68.5)
  Top Layer w0.3: v1@62.3,69.8 76.257,69.8 77.973,71.516 U3.22@77.973,74.639
  Bottom Layer w0.3: v1(62.1,68.5) v1(62.1,70)
AT_MOSI: DA6.22 U3.23 | length 42.8
  Top Layer w0.25: 63.308,69.267 76.395,69.267 78.473,71.345 U3.23@78.473,74.639
  Top Layer w0.254: DA6.22@45.55,76.575 45.55,75.825 46.127,75.248 46.127,71.331 48.191,69.267 63.308,69.267
AT_NCS: DA6.23 U3.20 | length 40.3
  Top Layer w0.254: DA6.23@46.05,76.575 46.05,76.024 46.7,75.374 46.7,71.537 48.516,69.721 60.321,69.721 62.1,71.5
  Top Layer w0.3: 62.1,71.5 64,71.5 64.4,71.1 76.207,71.1 76.996,71.888 76.996,73.809 76.973,73.832 U3.20@76.973,74.639
AT_SCK: DA6.19 U3.21 | length 46.3
  Top Layer w0.254: DA6.19@44.05,76.575 44.05,74.396 45.1,73.346 45.1,70.8 48.283,67.617 ; v1@63.1,70.4 v1(63.3,70.6) 76.382,70.6 77.473,71.691 U3.21@77.473,74.639 ; 63.3,68.1 v1(63.3,68.5)
  Top Layer w0.3: 48.283,67.617 62.817,67.617 63.3,68.1
  Bottom Layer w0.3: v1(63.3,68.5) v1(63.3,70.6)
AT_SLPTR: DA6.11 U3.24 | length 61.3
  Top Layer w0.25: 41.5,67.8 41.503,67.8 42.203,67.1 63.2,67.1 64.85,68.75 76.55,68.75
  Top Layer w0.254: 41.5,67.8 37.9,71.4 37.9,79.475 38.9,80.475 40.9,80.475 41.65,79.725 DA6.11@42.4,79.725
  Top Layer w0.3: 76.55,68.75 78.973,71.173 U3.24@78.973,74.639
CAN_H: C48.2 D12.3 P3.4 R45.1 U4.7 | length 141.7
  Top Layer w0.5: 164.8,12.1 187.9,12.1 193,17.2 193,29.572 199.1,35.672 199.1,71.94 188.5,82.54 188.5,98.5 187.342,99.658 R45.1@185.581,99.658 ; D12.3@178.05,100.435 185.079,100.435 R45.1@185.581,99.933 ; U4.7@178.1,96.935 179.552,96.935 180.052,97.435 180.052,100.435
  Top Layer w1: P3.4@160.55,6.75 160.55,7.65 164.8,11.9
CAN_L: C49.2 D11.3 P3.5 R46.1 U4.6 | length 137.7
  Top Layer w0.5: 155.6,11 155.6,11.2 157.9,13.5 187.9,13.5 192.227,17.827 192.227,29.789 198.4,35.962 198.4,71.65 187.8,82.25 187.8,94.368 186.834,95.333 R46.1@185.581,95.333
  Top Layer w0.6: U4.6@178.1,95.665 184.774,95.665 185.006,95.433 R46.1@185.581,95.433
  Top Layer w1: P3.5@155.575,6.55 155.575,10.975 155.6,11
CAN_RX: U3.44 U4.4 | length 112.5
  Top Layer w0.25: U3.44@85.023,82.189 86.639,82.189 87.7,83.25 87.7,86.475 v1(89.775,88.55) ; v1@90.263,91.612 90.263,91.863 91.925,93.525 91.925,103.061 93.414,104.55 165.95,104.55 171.552,98.948 171.552,95.235 172.435,94.352 U4.4@172.873,94.352
  Bottom Layer w0.25: v1(89.775,88.55) 89.75,88.575 89.75,91.225 v1(90.075,91.55)
CAN_STB: U3.53 U4.8 | length 121.9
  Top Layer w0.25: v1(78.2,89.35) 78.2,89.875 79.675,91.35 87.475,91.35 90.75,94.625 90.75,103.425 92.825,105.5 166.575,105.5 169.25,102.825 176.45,102.825 176.875,102.4 176.875,99.175 177.845,98.205 U4.8@178.1,98.205 ; v1(80.7,87.95) 80.7,87.725 80.973,87.452 U3.53@80.973,86.239
  Bottom Layer w0.25: v1(78.2,89.35) 79.6,87.95 v1(80.7,87.95)
CAN_TX: U3.45 U4.1 | length 109.2
  Top Layer w0.25: U3.45@85.023,82.689 86.364,82.689 87.2,83.525 87.2,86.95 v1@88.675,88.425 ; v1(88.925,91.525) 91.275,93.875 91.275,103.048 93.277,105.05 166.284,105.05 U4.1@173.214,98.119
  Bottom Layer w0.25: v1(88.65,88.625) 88.925,88.9 v1(88.925,91.525)